# Altium PCB PCB1.PcbDoc
Units mil, origin at the board's own origin, x right, y up, seen from the top; angles counter-clockwise.
Board outline 1640 x 1175 mil, 2 copper layers (Top Layer, Bottom Layer); 6 components, 22 nets, 32 pads, 0 vias.
Unrouted connection lines stored in the file: 10.
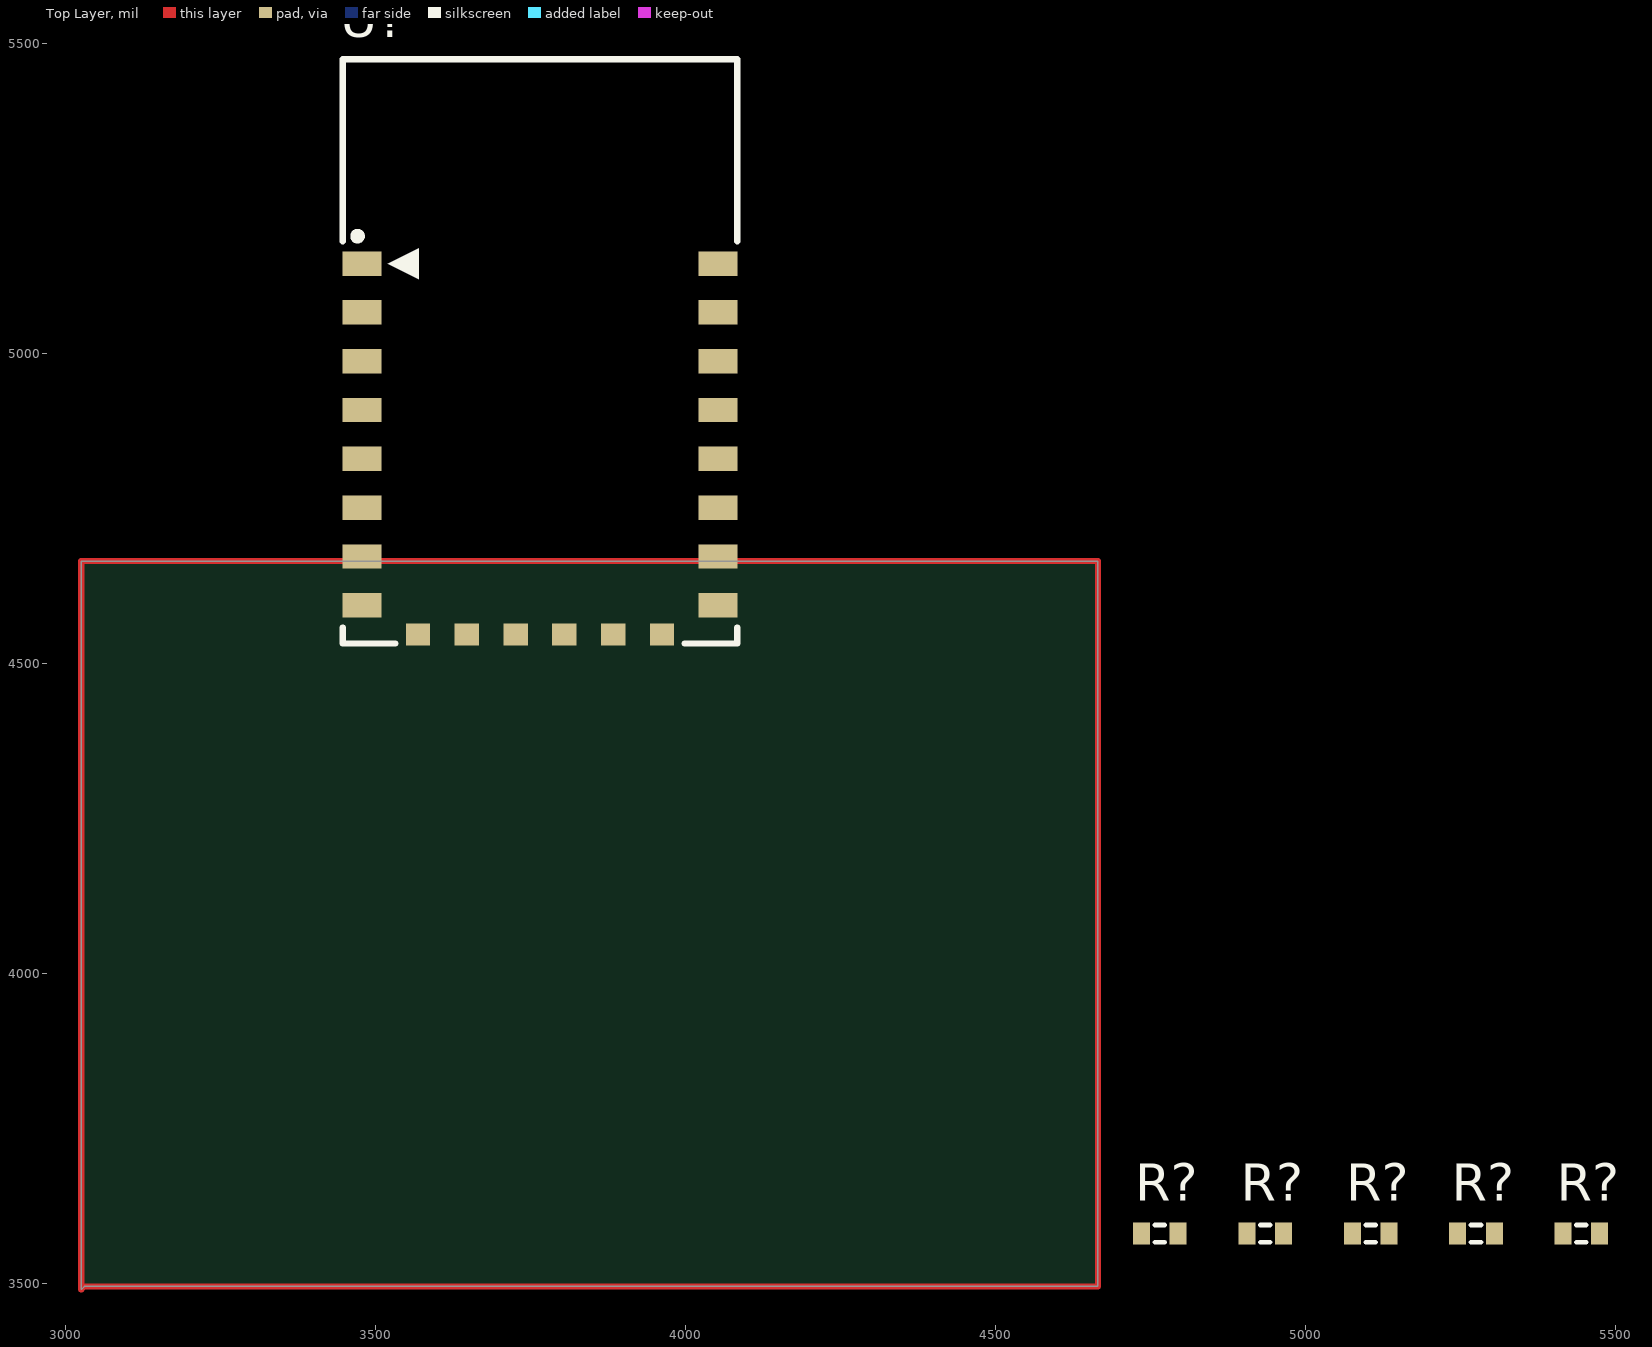
[diagram p0: Top Layer view]
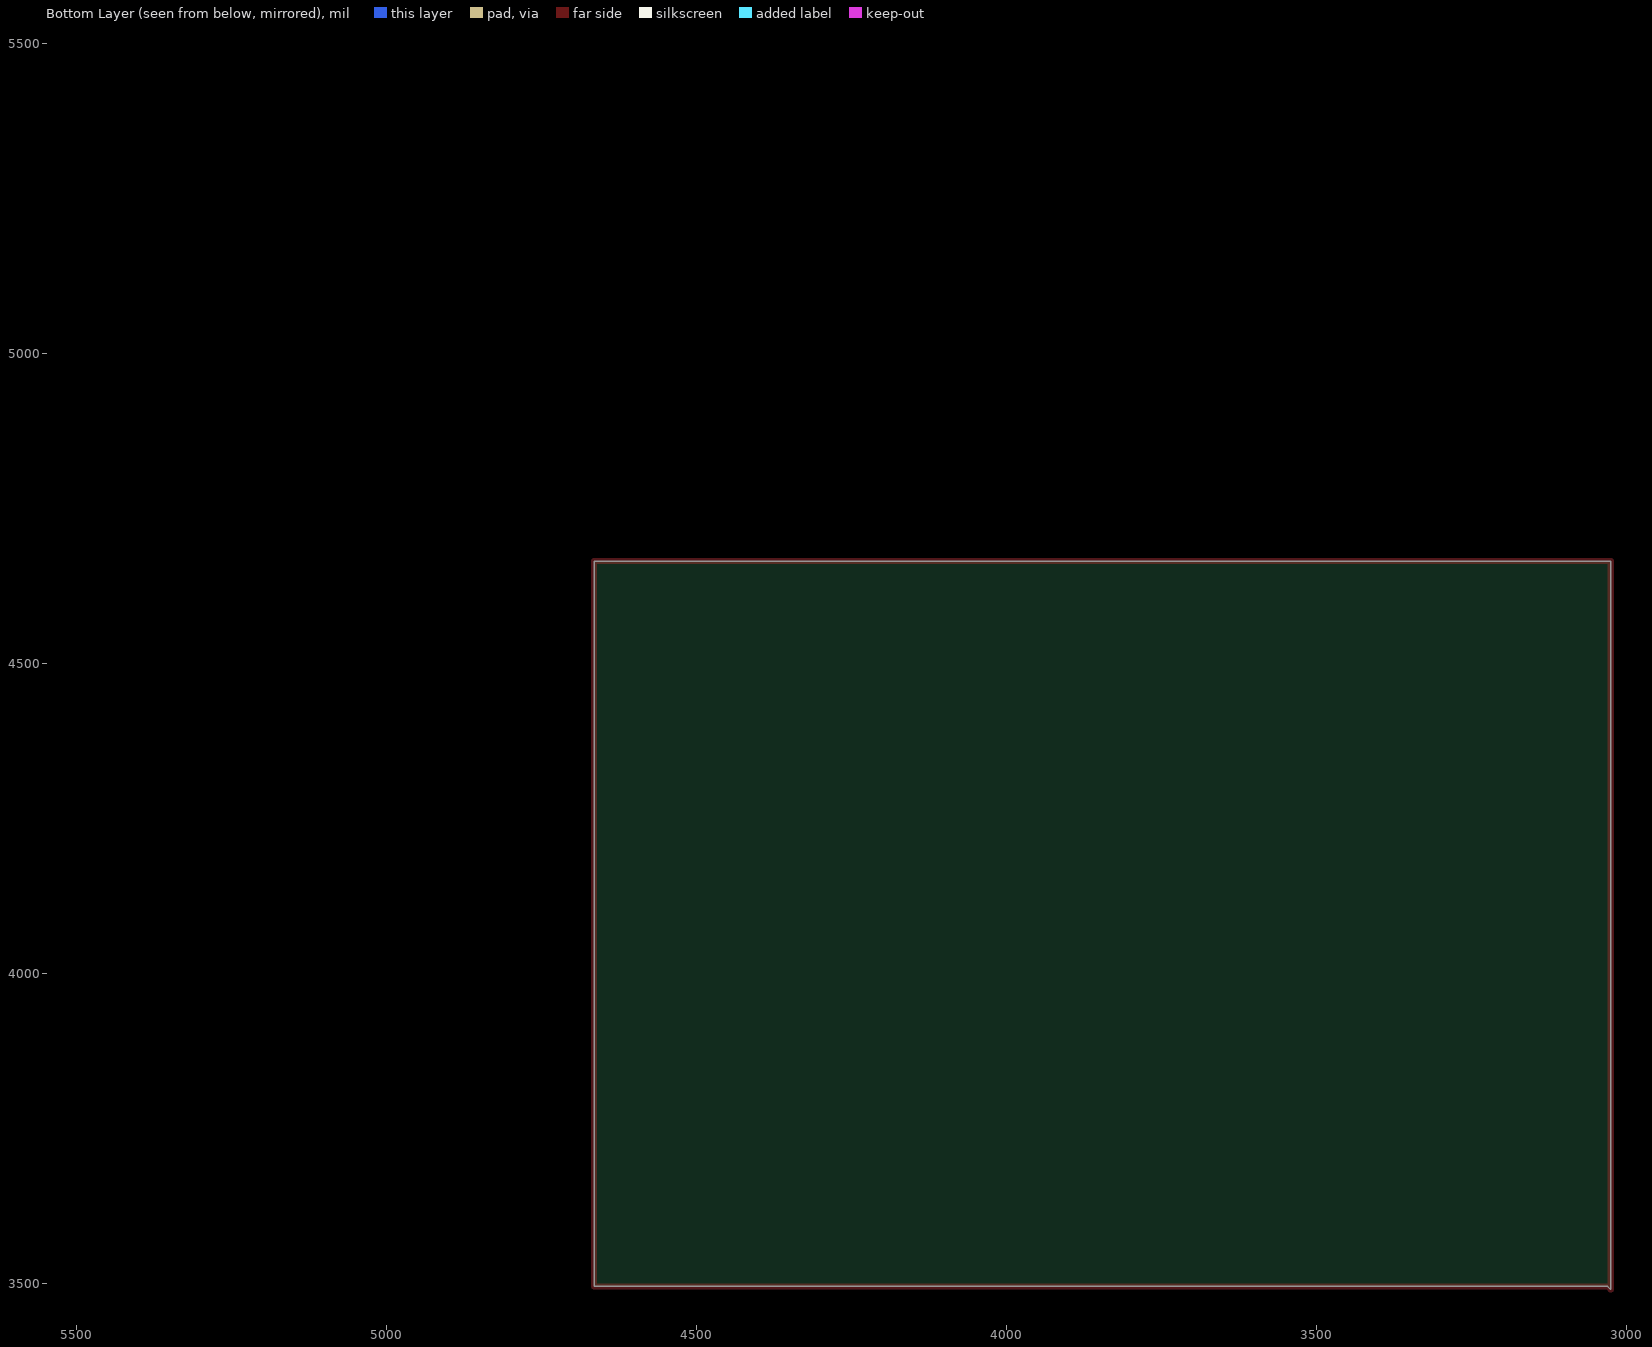
[diagram p1: Bottom Layer view, seen from below]

## Layer stack, top to bottom
Top Solder: solder mask 0.4, Solder Resist, Dk 3.5
Top Layer: signal copper 1.4
Dielectric 1: dielectric 12.6, FR-4, Dk 4.8
Bottom Layer: signal copper 1.4
Bottom Solder: solder mask 0.4, Solder Resist, Dk 3.5

## Board outline
3025,3490 3030,3495 4665,3495 4665,4665 3025,4665

## Design rules (kind name [scope] priority, off if disabled: settings)
Clearance [All] p1: gap=10
PolygonConnect [All] p1: connectstyle=Relief reliefconductorwidth=10 reliefentries=4 polygonreliefangle="90 Angle" airgapwidth=10
RoomDefinition Sheet1 [InComponentClass('Sheet1')] p1: confinementstyle=ConfineIn formatcopy=TRUE lockcomponents=FALSE outline 0,0 2000,0 2000,1000 0,1000
RoutingVias [All] p1: holewidth=28 width=50 viastyle="Through Hole" minholewidth=28 minwidth=50 maxholewidth=28 maxwidth=50
SolderMaskExpansion [All] p1: expansion=4
Width [All] p1: maxlimit=10 minlimit=10 preferedwidth=10
30 further rules are at their usual default settings.

## Classes and differential pairs
component class Sheet1: R? U?

## Components (designator, comment, footprint, x,y, rotation, side; value= is the part's Value field where it differs from the comment)
R? "Res3" J1-0603 4765,3580 r0 top
R? "Res3" J1-0603 4935,3580 r0 top
R? "Res3" J1-0603 5105,3580 r0 top
R? "Res3" J1-0603 5275,3580 r0 top
R? "Res3" J1-0603 5445,3580 r0 top
U? "ESP_12_E" ESP_12_E_L 3450,5145 r0 top

## Footprints (in the part's own frame and the unit in brackets; to place one, negate y for a bottom-side part, rotate by r counter-clockwise, add the part's x,y. Pads: shape width x height; smd on the part's side, far side on the other; paste and mask are expansions set on the pad)
ESP_12_E_L [mm]
  rect 1.6x1 smd: 1(0.7,0) 2(0.7,-2) 3(0.7,-4) 4(0.7,-6) 5(0.7,-8) 6(0.7,-10) 7(0.7,-12) 8(0.7,-14) 15(15.3,-14) 16(15.3,-12) 17(15.3,-10) 18(15.3,-8) 19(15.3,-6) 20(15.3,-4) 21(15.3,-2) 22(15.3,0)
  rect 1x0.9 smd: 9(3,-15.2) 10(5,-15.2) 11(7,-15.2) 12(9,-15.2) 13(11,-15.2) 14(13,-15.2)
  silkscreen extent -0.08,-15.57 16.08,8.37, body extent 0,-15.49 16,8.51, height 2.75
J1-0603 [mm] "Chip Resistor, Body 1.6x0.8mm, IPC High Density"
  rect 0.7x0.9 smd: 1(-0.75,0) 2(0.75,0)
  silkscreen extent -0.2,-0.35 0.2,0.35, body extent -0.85,-0.48 0.85,0.48, height 0.9

## Part data
R? R? R? R? R?: "Resistor"
U?: "ESP-12 Wi-Fi Module by AI-Thinker"

## Nets (pads, with @x,y where several pads share a name; then routed paths per layer and width w, separated by ;. In a path a pad name is that pad's centre, name@x,y a point inside that pad or via, vN(x,y) a via of type N, cw(c..) or ccw(c..) an arc to the next point about the centre after c; other vN are vias at no path point)
ADC: U?.2
EN: R?.2@5134.53,3580 U?.3
GND: R?.1@4735.47,3580 U?.15
GPIO0: R?.2@5474.53,3580 U?.18
GPIO2: R?.2@5304.53,3580 U?.17
GPIO4: U?.19
GPIO5: U?.20
GPIO9: U?.11
GPIO10: U?.12
GPIO12: U?.6
GPIO13: U?.7
GPIO14: U?.5
GPIO15: R?.2@4794.53,3580 U?.16
GPIO16: U?.4
NRST: R?.2@4964.53,3580 U?.1
RXD0: U?.21
SPI_CLK: U?.14
SPI_INT: U?.13
SPI_MISO: U?.10
SPI_MOSI: U?.9
TXD0: U?.22
VDD3V3: R?.1@4905.47,3580 R?.1@5075.47,3580 R?.1@5245.47,3580 R?.1@5415.47,3580 U?.8
copper on no net: | length 5627.1
  Top Layer w10: 3025,3490 3030,3495 4665,3495 4665,4665 3175,4665 3025,4665 3025,4650 3025,3490

## Text inside footprints (layer, text, board x,y; h text height)
U?: Mechanical 13 "CUTOUT POLYGON" at 3509,5433 h10; Mechanical 13 "ANTENNA AREA" at 3509,5453 h10